# Altium PCB 智能笔 - 单个按键.PCBDOC
Units mil, origin at the board's own origin, x right, y up, seen from the top; angles counter-clockwise.
Board outline 550.11 x 317.89 mil, 2 copper layers (TopLayer, BottomLayer); 2 components, 40 nets, 7 pads, 5 vias.
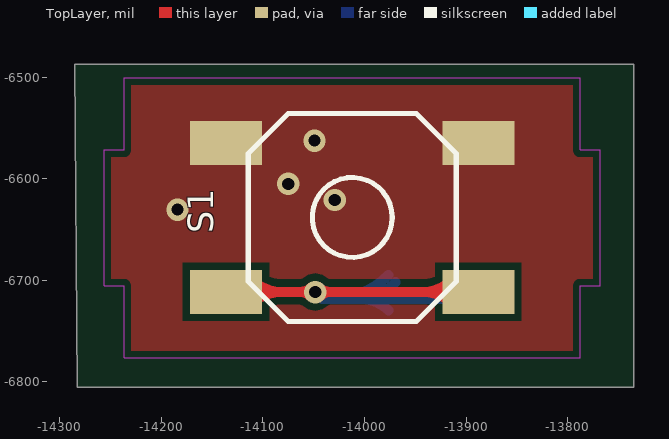
[diagram p0: TopLayer view]
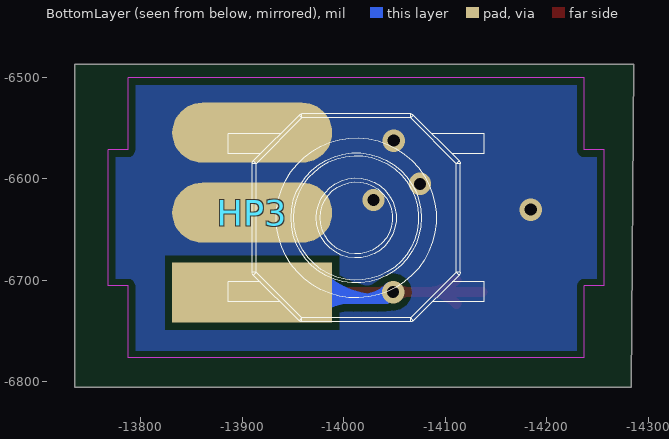
[diagram p1: BottomLayer view, seen from below]

## Layer stack, top to bottom
TopLayer: signal copper 1.4
Dielectric: core 12.6, FR-4, Dk 4.8
BottomLayer: signal copper 1.4

## Board outline
-14285.28,-6487.43 -13735.17,-6487.43 -13735.17,-6805.33 -14282.79,-6805.33

## Design rules (kind name [scope] priority, off if disabled: settings)
Clearance [All] p1: gap=7
ComponentClearance [All] p1 off: gap=10 collisioncheckmode=3
FanoutControl Fanout_LCC [All] p1 off: bgadir=Out bgaviamode=Centered fanoutstyle=Auto fanoutdirection=Alternating viagrid=1 // Protel DXP Scope 1 Expression Was: IsLCC   Fanout_LCC (Default Rule)
FanoutControl Fanout_BGA [All] p2 off: bgadir=Out bgaviamode=Centered fanoutstyle=Auto fanoutdirection=Alternating viagrid=1 // Protel DXP Scope 1 Expression Was: IsBGA   Fanout_BGA (Default Rule)
FanoutControl Fanout_SOIC [All] p3 off: bgadir=Out bgaviamode=Centered fanoutstyle=Auto fanoutdirection=Alternating viagrid=1 // Protel DXP Scope 1 Expression Was: IsSOIC   Fanout_SOIC (Default Rule)
FanoutControl Fanout_Default [All] p4: bgadir=Out bgaviamode=Centered fanoutstyle=Auto fanoutdirection=Alternating viagrid=1 // Fanout_Default (Default Rule)
FanoutControl Fanout_Small [All] p5 off: bgadir=Out bgaviamode=Centered fanoutstyle=Auto fanoutdirection=Alternating viagrid=1 // Protel DXP Scope 1 Expression Was: (CompPinCount < 5)   Fanout_Small (Default Rule)
PolygonConnect [All] p1: connectstyle=Direct reliefconductorwidth=10 reliefentries=4 polygonreliefangle="90 Angle"
RoutingVias [All] p1: holewidth=28 width=50 viastyle="Through Hole" minholewidth=28 minwidth=50 maxholewidth=28 maxwidth=50
SolderMaskExpansion [All] p1: expansion=4
TestPointUsage [All] p1: valid=0 allowmultiple=FALSE
Testpoint [(IsPad And (OnTopLayer Or OnBottomLayer))] p1: side=3 testpointundercomponent=TRUE minsize=40 maxsize=100 preferedsize=60 minholesize=20 maxholesize=40 preferedholesize=32 testpointgrid=1 style=297 order=-539222988
Width [All] p1: maxlimit=1111 minlimit=1 preferedwidth=10
12 further rules are at their usual default settings.

## Components (designator, comment, footprint, x,y, rotation, side; value= is the part's Value field where it differs from the comment)
HP3 "Header 3" "2.0 3P 焊盘" -13909.92,-6712.11 r0 bottom
S1 "SW-PB" SW_smt4*4 -14012.16,-6638.07 r180 top

## Footprints (in the part's own frame and the unit in brackets; to place one, negate y for a bottom-side part, rotate by r counter-clockwise, add the part's x,y. Pads: shape width x height; smd on the part's side, far side on the other; paste and mask are expansions set on the pad)
"2.0 3P 焊盘" [mm]
  rect 4x1.5 smd: 1(0,0)
  oval 4x1.5 smd: 2(0,-2) 3(0,-4)
SW_smt4*4 [mm]
  rect 1.8x1.1 smd: 1(-3.153,1.859) 1(3.153,1.859) 2(-3.153,-1.859) 2(3.153,-1.859)
  silkscreen extent -2.6,-2.6 2.6,2.6

## Part data
HP3: "Header, 3-Pin"
S1: "Switch"

## Via types
v1: diameter 22, hole 12, TopLayer to BottomLayer, 5 vias

## Nets (pads, with @x,y where several pads share a name; then routed paths per layer and width w, separated by ;. In a path a pad name is that pad's centre, name@x,y a point inside that pad or via, vN(x,y) a via of type N, cw(c..) or ccw(c..) an arc to the next point about the centre after c; other vN are vias at no path point)
3.3V: 
GND: HP3.2 HP3.3 S1.2
  other v1: -14184.09,-6630.33 -14029.26,-6620.85 -14075.08,-6605.05 -14049.28,-6562.39
NetCU3_2: 
NetCY1_1: 
NetCY1_2: 
NetCY2_1: 
NetCY2_2: 
NetCY5_2: 
NetCY6_1: 
NetCY7_1: 
NetD81_1: 
NetD81_2: 
NetD91_2: 
NetDUT1_1: 
NetDUT1_2: 
NetDV1_1: 
NetDV3_1: 
NetRY4_2: 
NetRZ1_1: 
NetRZ3_2: 
NRST: 
PA1: 
PA2: 
PA3: 
PB4: 
PB5: 
PC3: 
PC4: 
PC5: HP3.1 S1.1 | length 716.9
  TopLayer w10: S1.1@-14136.29,-6711.26 S1.1@-13888.02,-6711.26 ; S1.1@-14110.74,-6723.04 cw(c-14082.31,-6751.47) -14082.31,-6711.26 cw(c-14082.31,-6671.06) S1.1@-14110.74,-6699.49 ; -14063.73,-6711.26 cw(c-14063.73,-6726.7) v1@-14052.81,-6715.78 ; -14062.38,-6711.26 ccw(c-14062.38,-6697.73) v1@-14052.81,-6707.3 ; v1@-14044.33,-6715.78 cw(c-14033.41,-6726.7) -14033.41,-6711.26 ; v1@-14044.33,-6707.3 ccw(c-14034.76,-6697.73) -14034.76,-6711.26 ; S1.1@-13913.58,-6723.04 ccw(c-13942,-6751.47) -13942,-6711.26 ccw(c-13942,-6671.06) S1.1@-13913.58,-6699.49
  BottomLayer w10: v1(-14048.57,-6711.54) -14041.74,-6718.37 HP3.1@-13921.6,-6718.37 ; v1@-14044.33,-6707.3 ccw(c-14017.59,-6680.56) -14017.59,-6718.37 ; -14033.47,-6718.37 ccw(c-14033.47,-6637.78) HP3.1@-13976.48,-6694.77 ; -14009.33,-6718.37 ccw(c-14009.33,-6661.92) HP3.1@-13969.41,-6701.84 ; -14003.23,-6718.37 cw(c-14003.23,-6756.21) HP3.1@-13976.48,-6729.45
PC6: 
PC7: 
PD1: 
PD2: 
PD3: 
PD4: 
PD5: 
PD6: 
VCC+4.2V: 
XuotgID: 
XuotgVBUS: 

## Polygon pours and split planes (outlines as drawn)
GND on TopLayer (solid, remove dead copper): -14259.8,-6494.43 -13756.98,-6494.43 -13756.98,-6794.06 -14264.94,-6794.06
GND on BottomLayer (solid, remove dead copper): -14262.37,-6499.57 -13758.91,-6499.57 -13758.91,-6781.2 -14261.08,-6781.2

## Keep-outs
KeepOutLayer:
  lines w0.13: -14256.37,-6705.43 -14236.68,-6705.43 -14236.68,-6776.29 -13787.86,-6776.29 -13787.86,-6705.43 -13768.18,-6705.43 -13768.18,-6571.57 -13787.86,-6571.57 -13787.86,-6500.7 -14236.68,-6500.7 -14236.68,-6571.57 -14256.37,-6571.57 -14256.37,-6705.43

## Silkscreen, mask and mechanical layers (free items; w line width, h text height)
BottomOverlay:
  circle w0.13: c-14012.27,-6638.5 r78.74
  circle w0.13: c-14012.27,-6638.5 r64.15
  circle w0.13: c-14012.27,-6638.5 r61.36
  circle w0.13: c-14012.27,-6638.5 r39.37
  circle w0.13: c-14012.27,-6638.5 r35.43
  lines w0.13: -14106.76,-6701.49 -14138.26,-6701.49 -14138.26,-6721.18 -14087.07,-6721.18 ; -14106.76,-6575.51 -14138.26,-6575.51 -14138.26,-6555.82 -14087.07,-6555.82 ; -13937.47,-6721.18 -13886.29,-6721.18 -13886.29,-6701.49 -13917.78,-6701.49 ; -13937.47,-6555.82 -13886.29,-6555.82 -13886.29,-6575.51 -13917.78,-6575.51 ; -14114.63,-6691.99 ccw(c-14110.7,-6691.99) -14113.48,-6694.77 ; -14114.63,-6691.99 -14114.63,-6585.01 ; -14114.63,-6691.99 -14110.7,-6691.99 ; -14114.63,-6585.01 cw(c-14110.7,-6585.01) -14113.48,-6582.23 ; -14114.63,-6585.01 -14110.7,-6585.01 ; -14113.48,-6694.77 -14068.54,-6739.71 ; -14113.48,-6694.77 -14110.7,-6691.99 ; -14113.48,-6582.23 -14068.54,-6537.29 ; -14113.48,-6582.23 -14110.7,-6585.01 ; -14110.7,-6691.99 -14110.7,-6585.01 ; -14110.7,-6691.99 -14065.76,-6736.92 ; -14110.7,-6585.01 -14065.76,-6540.07 ; -14068.54,-6739.71 ccw(c-14065.76,-6736.92) -14065.76,-6740.86 ; -14068.54,-6739.71 -14065.76,-6736.92 ; -14068.54,-6537.29 cw(c-14065.76,-6540.07) -14065.76,-6536.14 ; -14068.54,-6537.29 -14065.76,-6540.07 ; -14065.76,-6740.86 -14065.76,-6736.92 ; -14065.76,-6740.86 -13958.78,-6740.86 ; -14065.76,-6736.92 -13958.78,-6736.92 ; -14065.76,-6540.07 -14065.76,-6536.14 ; -14065.76,-6540.07 -13958.78,-6540.07 ; -14065.76,-6536.14 -13958.78,-6536.14 ; -13958.78,-6740.86 ccw(c-13958.78,-6736.92) -13956,-6739.71 ; -13958.78,-6740.86 -13958.78,-6736.92 ; -13958.78,-6736.92 -13956,-6739.71 ; -13958.78,-6736.92 -13913.85,-6691.99 ; -13958.78,-6540.07 -13958.78,-6536.14 ; -13958.78,-6540.07 -13956,-6537.29 ; -13958.78,-6540.07 -13913.85,-6585.01 ; -13958.78,-6536.14 cw(c-13958.78,-6540.07) -13956,-6537.29 ; -13956,-6739.71 -13911.06,-6694.77 ; -13956,-6537.29 -13911.06,-6582.23 ; -13913.85,-6691.99 -13913.85,-6585.01 ; -13913.85,-6691.99 -13911.06,-6694.77 ; -13913.85,-6691.99 -13909.91,-6691.99 ; -13913.85,-6585.01 -13911.06,-6582.23 ; -13913.85,-6585.01 -13909.91,-6585.01 ; -13911.06,-6694.77 ccw(c-13913.85,-6691.99) -13909.91,-6691.99 ; -13911.06,-6582.23 cw(c-13913.85,-6585.01) -13909.91,-6585.01 ; -13909.91,-6691.99 -13909.91,-6585.01